# Altium PCB Main_board.PcbDoc (part 2 of 2)
Units mm, origin at the board's own origin, x right, y up, seen from the top; angles counter-clockwise.
Board outline 130 x 70 mm, 4 copper layers (Top Layer, Int1 (GND), Int2 (PWR), Bottom Layer), stack 1.577 mm thick; 69 components, 62 nets, 244 pads, 492 vias.
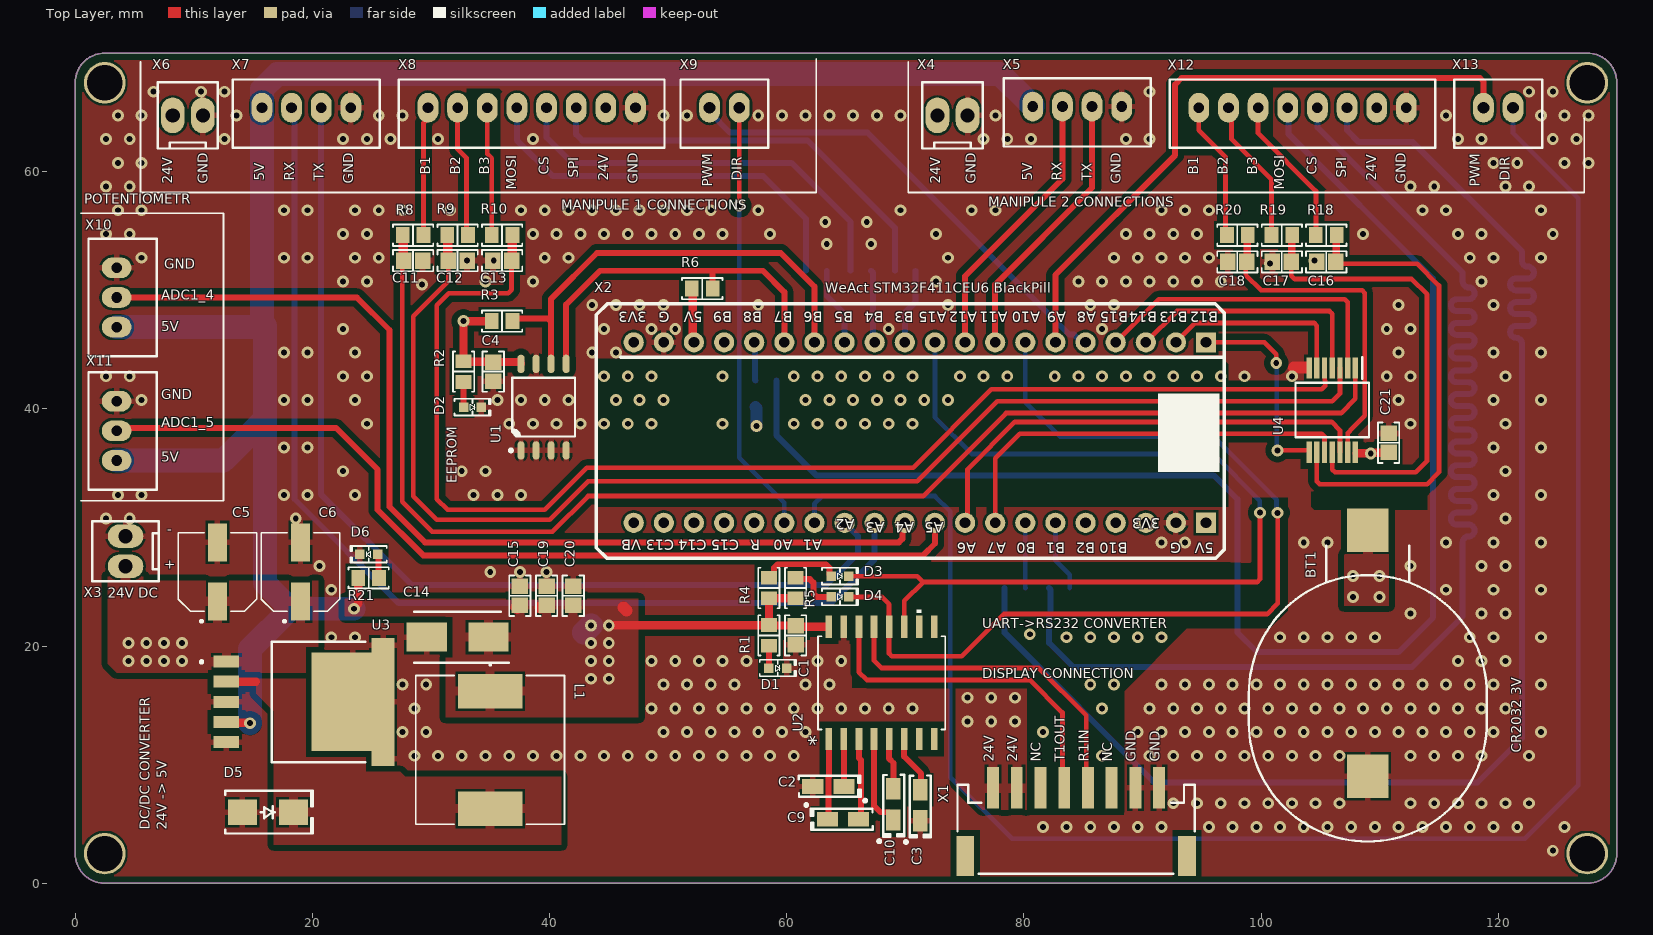
[diagram p0: Top Layer view]

## Via types
v1: diameter 1, hole 0.5, Top Layer to Bottom Layer, tented both sides, 492 vias

## Nets (pads, with @x,y where several pads share a name; then routed paths per layer and width w, separated by ;. In a path a pad name is that pad's centre, name@x,y a point inside that pad or via, vN(x,y) a via of type N, cw(c..) or ccw(c..) an arc to the next point about the centre after c; other vN are vias at no path point) (continued)
UART2_RX: (continued)
  Bottom Layer w0.5: X7.2@18.5,65.4 18.5,32.4 27.25,23.65 63.75,23.65 67.42,27.32 X2.29
UART2_TX: X2.28 X7.3 | length 85.3
  Bottom Layer w0.5: X7.3@21,65.4 20.761,65.161 20.761,64.15 20.718,64.107 20.718,32.811 28.379,25.15 63.361,25.15 66,27.789 66,29.28 X2.28
UART6_RX: X2.9 X5.2 | length 23.7
  Top Layer w0.5: X2.9 75.04,51.19 83.25,59.4 X5.2@83.25,65.889
UART6_TX: X2.8 X5.3 | length 23.6
  Top Layer w0.5: X2.8 77.58,50.48 85.75,58.65 X5.3@85.75,65.805
VIN: C5.1 C6.1 U3.1 X1.7 X1.8 X3.1 X4.1 X6.1 X8.7 X12.7 | length 162.2
  Int2 (PWR) w2.5: X6.1@8.23,64.65 8.23,61.614 9.694,60.15 ; v1(9,18.75) v1(9,20.25) ; 9.694,20.25 9.694,60.15 ; X8.7 44.75,61.614 43.286,60.15 ; X4.1 72.71,61.186 73.746,60.15 ; X12.7@109.75,65.75 109.75,61.614 108.286,60.15 73.746,60.15 ; 9.694,60.15 43.286,60.15 ; 43.286,60.15 73.746,60.15
  other v1: 75.25,13.65 77.25,13.65 79.25,13.65 75.25,15.65 77.25,15.65 79.25,15.65 4.5,18.75 6,18.75 7.5,18.75 4.5,20.25 6,20.25 7.5,20.25
pads on no net: U2.7 U2.8 U2.9 U2.10 X1.3 X1.6 X1.M X2.17 X2.20 X2.22 X2.23 X2.24 X2.25 X2.36 X2.37 X2.38

## Polygon pours and split planes (outlines as drawn)
GND on Top Layer "GND_L01_P037" (solid, remove dead copper, pour order 37): 0,70 130,70 130,0 0,0
5V on Top Layer "5V_L01_P034" (solid, pour order 34): 31.25,14 47.5,14 47.5,24 45,24 22.75,24 22.75,22.5 31.25,22.5
NetD5_2 on Top Layer "NETD5_2_L01_P032" (solid, pour order 32): 15.25,17.5 15.5,17.75 26.25,17.75 26.25,10.57 27.82,9 41,9 41,3.25 40.5,3.25 16.75,3.25 16.75,14.5 15.25,16
VIN on Top Layer "VIN_L01_P012" (solid, pour order 12): 2.75,25.5 2.75,18.5 3.5,17.75 20.5,17.75 20.5,25.5
VIN on Top Layer "VIN_L01_P010" (solid, pour order 10): 2.75,28 2.75,21 5.75,21 5.75,27.75 5.5,28
VIN on Top Layer "VIN_L01_P016" (solid, pour order 16): 80.25,6.2 80.25,16.4 74.25,16.4 74.25,8.45 76.5,6.2
NetBT1_1 on Top Layer "NETBT1_1_L01_P024" (solid, pour order 24): 107,31.9 107,23.4 110.75,23.4 110.75,31.9
GND on Bottom Layer "GND_L04_P029" (solid, pour order 29): 0,70 130,70 130,0 0,0
5V on Bottom Layer "5V_L04_P017" (solid, pour order 17): 42,22.65 42,16.65 46.5,16.65 46.5,22.65
GND on Int2 (PWR) "GND_L03_P039" (solid, pour order 39): 0,70 130,70 130,0 0,0
VIN on Int2 (PWR) "VIN_L03_P019" (solid, pour order 19): 7.475,21 7.475,61.4 11,61.4 13,61.4 13,21
VIN on Int2 (PWR) "VIN_L03_P018" (solid, pour order 18): 2.75,21 13,21 13,11.507 15.257,9.233 80.25,8.75 80.25,4.497 79.097,3.347 6.304,3.587 2.75,6.075
VIN on Int2 (PWR) "VIN_L03_P038" (solid, pour order 38): 80.25,8.5 80.25,17.16 74.094,17.16 73.5,16.566 73.5,8.5
NetBT1_1 on Int2 (PWR) "NETBT1_1_L03_P025" (solid, pour order 25): 46.5,27.6 46.6,27.5 46.6,23.4 107,23.4 110.75,23.4 110.75,26.9
5V on Int2 (PWR) "5V_L03_P021" (solid, pour order 21): 41.75,16.4 46,16.4 46,32.4 47.25,33.65 95.25,33.65 95.25,37.65 44.513,37.65 41.939,35.102
NetBT1_1 on Int2 (PWR) "NETBT1_1_L03_P023" (solid, pour order 23): 107,26.9 107,23.4 110.75,23.4 110.75,26.9
VIN on Int2 (PWR) "VIN_L03_P022" (solid, pour order 22): 80.25,15.9 80.25,16.65 74.25,16.65 74.25,15.9
GND on Int1 (GND) "GND_L02_P026" (solid, pour order 26): 0,70 130,70 130,0 0,0

## Keep-outs
Keep-Out Layer:
  the board outline again, w0.15

## Other copper
Top Layer:
  pour cut-out: 28.75,48.25 30.25,48.25 30.25,32.5 30,32.25 29.6,32.65 28.5,32.65
  pour cut-out: 80.25,16.4 80.25,6 88.45,6 88.45,16.2 93.75,21.5 100.75,21.5 102.25,23 102.25,32.5 99.25,32.5 99.25,27 97.411,27.089 64.08,27.089 64.08,23.92 64.218,22.763 65.516,22.747 65.516,16.5
  pour cut-out: 33.706,55.825 33.706,61.442 32.956,62.192 33,62.236 33,67 35.75,67 36,66.75 35.831,66.581 35.831,55.825
  pour cut-out: 93.606,67.144 93.506,67.044 93.506,61.4 97.5,61.4 97.5,55.825 103.919,55.825 103.75,58.5 100.666,58.5 105.5,58.5 101,63 101,67.25
  pour cut-out: 104.25,33 114.314,33 114,32.686 114,31.5 104.5,31.5 104.25,31.75
  pour cut-out: 44,44.25 96.75,44.25 97.25,43.75 97.25,31.75 44,31.75
Bottom Layer:
  pour cut-out: 85.535,16.882 85.5,16.847 85.5,10 86.563,8.937 123.605,8.937 124.5,9.832 124.5,20 111.728,20 111.478,20.25 100,20.25 100,20 98,18 85.5,18
  pour cut-out: 85.5,11.75 77.25,20 82.25,20 84.625,17.625 84.769,17.769 85.5,17.769
  pour cut-out: 17.061,64.846 17.061,47.813 17.5,47.375 17.5,64.875
  pour cut-out: 113.439,51.268 113.439,51.578 101.5,63.517 101.5,64.75 113.5,64.75 124.25,54 124.25,51.221
  pour cut-out: 111.478,20.25 111.557,20.25 113.439,22.132 113.439,51.268 124.5,51.268 124.5,19.692
  pour cut-out: 17.311,32.189 17.311,26.943 21.793,22.461 41.694,22.461 41.694,22.65 42,22.956 42.09,22.866 46.716,22.866 46.716,23.216 46.632,23.132 27.035,23.132 17.982,32.185
  pour cut-out: 17.311,64.285 17.311,32.189 17.5,32 17.685,32.185 17.982,32.185 17.982,64.232 18,64.25
  pour cut-out: 20.419,66.939 18.581,66.939 19.061,66.459 19.061,32.632 27.482,24.211 63.518,24.211 66.859,27.552 66.859,29.511 66.535,29.511 66.518,29.495 66.518,27.575 63.575,24.632 28.165,24.632 28.165,24.804 20.157,32.811 20.419,33.072
  pour cut-out: 40.081,66.939 40.311,66.709 40.311,63.132 42.175,61.268 60.615,61.268 65.893,55.99 66.153,56.25 67.25,56.25 67.25,56.357 61.475,62.132 42.535,62.132 42.535,62.304 41.689,63.15 41.919,63.379 41.919,66.939
  pour cut-out: 37.581,66.939 39.419,66.939 39.189,66.709 39.189,62.9 37.828,62.9 37.811,62.882
  pour cut-out: 37.811,62.882 40.482,60.211 58.232,60.211 62.143,56.3 62.143,56.24 64.24,56.24 64.25,56.25 60.311,60.189 41.676,60.189 39.189,62.676 39.189,62.9
  pour cut-out: 44,44.25 96.75,44.25 97.25,43.75 97.25,31.75 44,31.75

## Silkscreen, mask and mechanical layers (free items; w line width, h text height)
Top Overlay:
  lines w0.15: 0.5,32.25 12.5,32.25 12.5,56.5 0.5,56.5 ; 5.5,69.25 5.5,58.25 62.5,58.25 62.5,69.5 ; 70.25,69.25 70.25,58.25 127.25,58.25 127.25,64.5
  text "B1" at 30.25,59.75 h1.4 r90
  text "B2" at 32.75,59.75 h1.4 r90
  text "B3" at 35.233,59.75 h1.4 r90
  text "CS" at 40.234,59.75 h1.4 r90
  text "B1" at 95,59.75 h1.4 r90
  text "B2" at 97.5,59.75 h1.4 r90
  text "B3" at 99.983,59.75 h1.4 r90
  text "CS" at 104.984,59.75 h1.4 r90
  text "SPI" at 42.734,59.5 h1.4 r90
  text "SPI" at 107.484,59.5 h1.4 r90
  text "5V" at 16.233,59.25 h1.4 r90
  text "RX" at 18.75,59.25 h1.4 r90
  text "TX" at 21.25,59.25 h1.4 r90
  text "24V" at 45.25,59.25 h1.4 r90
  text "DIR" at 56.5,59.25 h1.4 r90
  text "5V" at 80.983,59.25 h1.4 r90
  text "RX" at 83.5,59.25 h1.4 r90
  text "TX" at 86,59.25 h1.4 r90
  text "24V" at 110,59.25 h1.4 r90
  text "DIR" at 121.25,59.25 h1.4 r90
  text "24V" at 8.5,59 h1.4 r90
  text "GND" at 11.483,59 h1.4 r90
  text "GND" at 23.733,59 h1.4 r90
  text "GND" at 47.733,59 h1.4 r90
  text "24V" at 73.25,59 h1.4 r90
  text "GND" at 76.233,59 h1.4 r90
  text "GND" at 88.483,59 h1.4 r90
  text "GND" at 112.483,59 h1.4 r90
  text "PWM" at 54,58.75 h1.4 r90
  text "PWM" at 118.75,58.75 h1.4 r90
  text "MOSI" at 37.483,58.5 h1.4 r90
  text "MOSI" at 102.233,58.5 h1.4 r90
  text "POTENTIOMETR" at 0.75,57.017 h1.4
  text "MANIPULE 2 CONNECTIONS" at 77,56.767 h1.4
  text "MANIPULE 1 CONNECTIONS" at 41,56.517 h1.4
  text "GND" at 7.5,51.517 h1.4
  text "WeAct STM32F411CEU6 BlackPill" at 63.25,49.517 h1.4
  text "ADC1_4" at 7.25,48.918 h1.4
  text "5V" at 7.25,46.267 h1.4
  text "GND" at 7.25,40.517 h1.4
  text "ADC1_5" at 7.25,38.168 h1.4
  text "5V" at 7.25,35.267 h1.4
  text "EEPROM" at 32.483,33.75 h1.4 r90
  text "-" at 7.75,29.185 h1.4
  text "+" at 7.5,26.234 h1.4
  text "24V DC" at 2.75,23.766 h1.4
  text "UART->RS232 CONVERTER /  /  / DISPLAY CONNECTION" at 76.5,17 h1.4
  text "CR2032 3V" at 122.233,11 h1.4 r90
  text "24V" at 77.75,10.25 h1.4 r90
  text "24V" at 79.75,10.25 h1.4 r90
  text "NC" at 81.734,10.25 h1.4 r90
  text "T1OUT" at 83.733,10.25 h1.4 r90
  text "R1IN" at 85.75,10.25 h1.4 r90
  text "NC" at 87.734,10.25 h1.4 r90
  text "GND" at 89.733,10.25 h1.4 r90
  text "GND" at 91.733,10.25 h1.4 r90
  text "DC/DC CONVERTER / 24V -> 5V" at 8,4.5 h1.4 r90

## Dimensions
0,0 to 0,70 on Mechanical 15
0,0 to 130,0 on Mechanical 15

## Text inside footprints (layer, text, board x,y; h text height)
U2: Top Overlay "*" at 63.124,11.594 h1.27 r90; Mechanical 13 "*" at 64.101,13.166 h1.27 r90
X2: Top Overlay "B12" at 96.376,48.485 h1.52 r180; Top Overlay "B13" at 93.811,48.485 h1.52 r180; Top Overlay "5V" at 96,29 h1.52 r180; Top Overlay "B10" at 88.75,29 h1.52 r180; Top Overlay "C14" at 53.25,29.25 h1.52 r180; Top Overlay "B7" at 60.503,48.485 h1.52 r180; Top Overlay "A8" at 86.089,48.485 h1.52 r180; Top Overlay "B15" at 88.781,48.485 h1.52 r180; Top Overlay "A10" at 81.39,48.485 h1.52 r180; Top Overlay "A12" at 76.081,48.485 h1.52 r180; Top Overlay "A2" at 65.75,31 h1.52 r180; Top Overlay "VB" at 47.75,29.25 h1.52 r180; Top Overlay "A1" at 63,29.25 h1.52 r180; Top Overlay "B1" at 83.5,29 h1.52 r180; Top Overlay "A5" at 73.25,30.75 h1.52 r180; Top Overlay "3V3" at 48.192,48.485 h1.52 r180; Top Overlay "A0" at 60.5,29.25 h1.52 r180; Top Overlay "B4" at 68.199,48.485 h1.52 r180; Top Overlay "5V" at 52.941,48.51 h1.52 r180; Top Overlay "C13" at 50.5,29.25 h1.52 r180; Top Overlay "B8" at 57.954,48.485 h1.52 r180; Top Overlay "B3" at 70.697,48.485 h1.52 r180; Top Overlay "A3" at 68.25,30.75 h1.52 r180; Top Overlay "B9" at 55.406,48.485 h1.52 r180; Top Overlay "G" at 93.25,29 h1.52 r180; Top Overlay "3V3" at 91.5,31.057 h1.52 r180; Top Overlay "B2" at 86,29 h1.52 r180; Top Overlay "A9" at 83.574,48.485 h1.52 r180; Top Overlay "A11" at 78.647,48.485 h1.52 r180; Top Overlay "A7" at 78.5,29 h1.52 r180; Top Overlay "A6" at 76,29 h1.52 r180; Top Overlay "G" at 50.123,48.485 h1.52 r180; Top Overlay "A15" at 73.516,48.485 h1.52 r180; Top Overlay "B6" at 63.051,48.485 h1.52 r180; Top Overlay "A4" at 70.75,30.75 h1.52 r180; Top Overlay "R" at 57.75,29.25 h1.52 r180; Top Overlay "C15" at 56,29.25 h1.52 r180; Top Overlay "B5" at 65.6,48.485 h1.52 r180; Top Overlay "B14" at 91.245,48.485 h1.52 r180; Top Overlay "B0" at 81,29 h1.52 r180